# EAGLE board smart-servo-addon-board v97 (EAGLE 9.7.0)
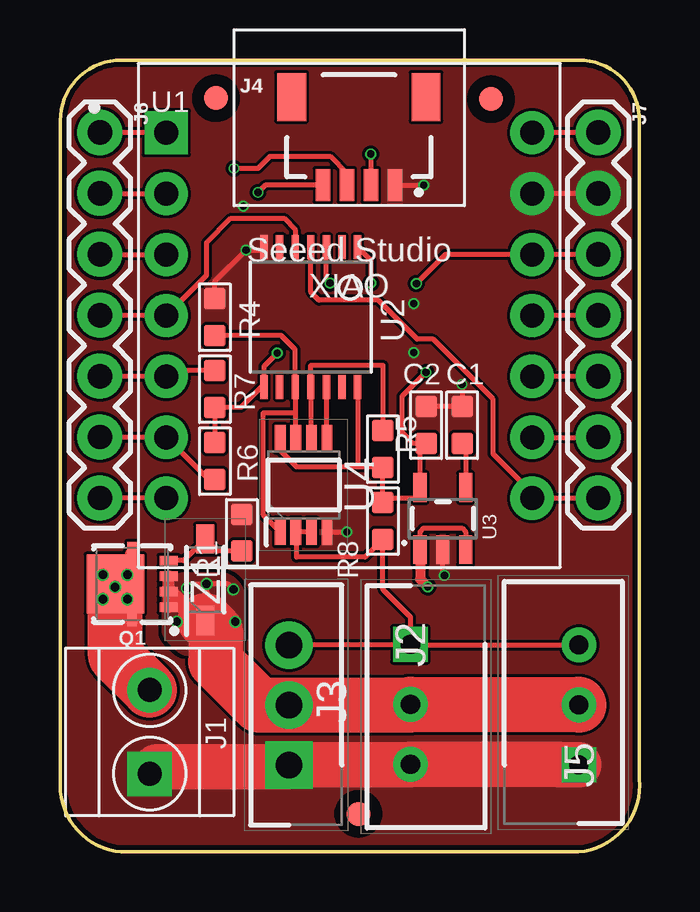
[diagram p0: board, top side]
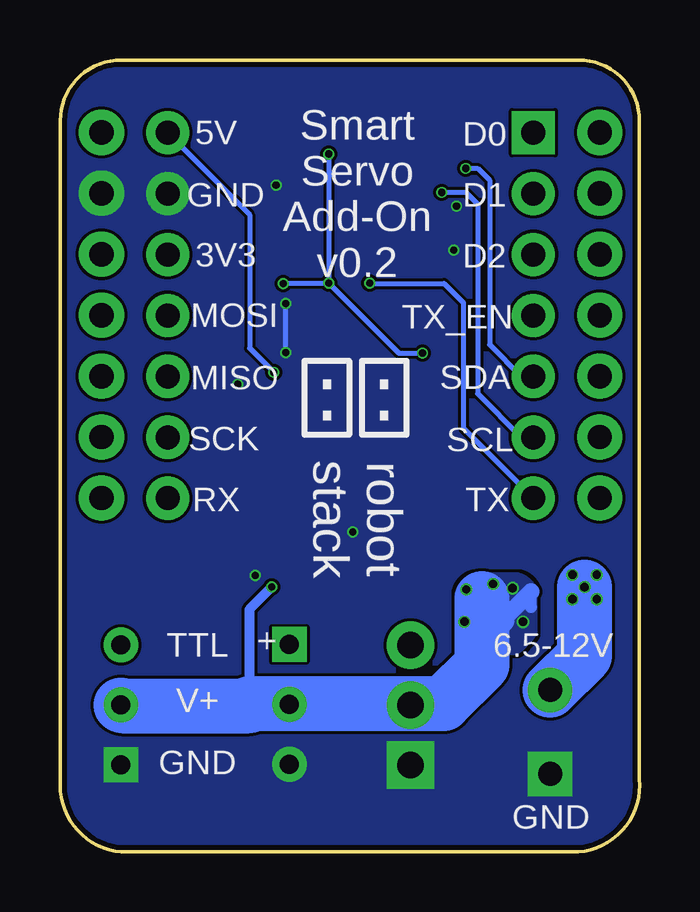
[diagram p1: board, bottom side, seen from below]

Size 24.15 x 33.02 mm. Coordinates in mm from the lower left corner, seen from the top.
Outline: 2.55,33.02 arc90 0.01,30.48 0.01,3.05 arc90 2.55,0 21.6,0 arc90 24.14,3.05 24.14,30.48 arc90 21.6,33.02 2.55,33.02
Copper layers (1*16): Top 0.035mm / dielectric 1.6mm / Bottom 0.035mm
Design rules "jlcpcb-2layers *": minimum track width 5mil, minimum drill 0.3mm, track to track 5mil, track to pad 5mil, pad to pad 5mil, via to via 5mil, smd to smd 5mil, copper to edge 0.2mm, drill to drill 6mil, minimum pad ring 10mil, minimum via ring 3mil, stop-mask expansion 4mil, vias tented up to drill 0mil, thermal gap 0mil

## Footprints (pad centres in the part's own frame; a part is rotated, then mirrored left to right if it is on the bottom)
C0603 = smd 0.889 x 0.889: 1 0,0.762; 2 0,-0.762
FIDUCIAL_1MM = smd 1 x 1: 1 0,0
H2-3.5-7.0X7.0MM = drill 1 pad 1.85 square: 1 -1.75,0 | drill 1 pad 1.85: 2 1.75,0
SHDR3W60P0X250_1X3_990X490X590 = drill 0.8 pad 1.2 square: 1 0,0 | drill 0.8 pad 1.2: 2 -2.5,0; 3 -5,0
SHDR3W64P0X250_1X3_1000X380X60 = drill 1.1 pad 1.65 square: 1 0,0 | drill 1.1 pad 1.65: 2 2.5,0; 3 5,0
JST04_1MM_RA = smd 0.6 x 1.35: 1 -1.5,0; 2 -0.5,0; 3 0.5,0; 4 1.5,0 | smd 1.2 x 2: NC1 2.8,-3.675; NC2 -2.8,-3.675
1X07 = drill 1.016 pad 1.88: 1 0,0; 2 2.54,0; 3 5.08,0; 4 7.62,0; 5 10.16,0; 6 12.7,0; 7 15.24,0
8-POWERVDFN-3X3 = smd 0.4 x 0.75: 1 -0.975,-1.525; 2 -0.325,-1.525; 3 0.325,-1.525; 4 0.975,-1.525 | smd 2.45 x 2.4: 5@1 0,0.7 | smd 0.53 x 0.4: 5@2 -1.49,0; 5@3 1.49,0
R0603 = smd 0.889 x 0.889: 1 0,0.762; 2 0,-0.762
XIAO-GENERIC-THRUHOLE-MODULE14P-2.54-21X17.8MM = drill 1 pad 1.7 square: 1 -7.62,7.62 | drill 1 pad 1.7: 2 -7.62,5.08; 3 -7.62,2.54; 4 -7.62,0; 5 -7.62,-2.54; 6 -7.62,-5.08; 7 -7.62,-7.62; 8 7.62,-7.62; 9 7.62,-5.08; 10 7.62,-2.54; 11 7.62,0; 12 7.62,2.54; 13 7.62,5.08; 14 7.62,7.62
TSSOP14 = smd 0.305 x 0.991: 1 -1.95,-2.918; 2 -1.3,-2.918; 3 -0.65,-2.918; 4 0,-2.918; 5 0.65,-2.918; 6 1.3,-2.918; 7 1.95,-2.918; 8 1.95,2.918; 9 1.3,2.918; 10 0.65,2.918; 11 0,2.918; 12 -0.65,2.918; 13 -1.3,2.918; 14 -1.95,2.918
SOT23-5 = smd 0.55 x 1.2: 1 -0.95,-1.3; 2 0,-1.3; 3 0.95,-1.3; 4 0.95,1.3; 5 -0.95,1.3
SOP65P400X130-8N = smd 1.1 x 0.45: 1 -1.95,0.975; 2 -1.95,0.325; 3 -1.95,-0.325; 4 -1.95,-0.975; 5 1.95,-0.975; 6 1.95,-0.325; 7 1.95,0.325; 8 1.95,0.975
SOD3716X145N = smd 1.2 x 0.75: 1 -1.7,0; 2 1.7,0

## Placement (x,y rotation side)
C1  10nf  [C0603]  16.75,17.8 0 top
C2  1uf  [C0603]  15.25,17.8 0 top
FD4  FIDUCIAL""  [FIDUCIAL_1MM]  6.5,31.43 0 top
FD5  FIDUCIAL""  [FIDUCIAL_1MM]  12.43,1.59 0 top
FD6  FIDUCIAL""  [FIDUCIAL_1MM]  17.96,31.39 0 top
J1  GREEN-2P-3.5  [H2-3.5-7.0X7.0MM]  3.73,5 90 top
J2  22-03-5035  [SHDR3W60P0X250_1X3_990X490X590]  14.6,8.66 90 top
J3  B3B-EH-A  [SHDR3W64P0X250_1X3_1000X380X60]  9.55,3.63 90 top
J4  QWIIC_RA  [JST04_1MM_RA]  12.45,27.8 180 top
J5  22-03-5035  [SHDR3W60P0X250_1X3_990X490X590]  21.62,3.63 270 top
J6  RS1-07-G  [1X07]  1.66,30 270 top
J7  RS1-07-G  [1X07]  22.43,30 270 top
Q1  9A/30V/15mΩ  [8-POWERVDFN-3X3]  3,11.18 90 top
R1  10K  [R0603]  7.58,13.31 0 top
R4  10K  [R0603]  6.45,22.3 180 top
R5  10K  [R0603]  13.45,16.8 180 top
R6  2K  [R0603]  6.45,16.3 180 top
R7  2K  [R0603]  6.45,19.3 0 top
R8  10K  [R0603]  13.45,13.8 0 top
U1  XIAO-THRUHOLE  [XIAO-GENERIC-THRUHOLE-MODULE14P-2.54-21X17.8MM]  12.05,22.37 0 top
U2  TXB0104PWR  [TSSOP14]  10.45,22.3 180 top
U3  SPX3819M5_5_0  [SOT23-5]  15.95,13.9 0 top
U4  SN74LVC2G241DCTR  [SOP65P400X130-8N]  10.15,15.3 90 top
Z1  BZT52C15-7-F  [SOD3716X145N]  6.05,11.35 90 top

## Library data of the parts
C1 = OPL_Capacitor; MPN: CC0603KRX7R9BB103
C2 = OPL_Capacitor; MPN: CC0603KRX7R8BB105
FD4-FD6 = Airquality_Sensor; BOM: EXCLUDE
J1 = OPL_Connector
J2 J5 = molex-22-03-5035; DESCRIPTION: Header 2.5mm SPOX,WTB,vert, shrouded, 3w Molex SPOX Series, Series Number 5267, 2.5mm Pitch 3 Way 1 Row Straight PCB Header, Solder Termination, 3A; HEIGHT: 5.9mm; MANUFACTURER_NAME: Molex; MANUFACTURER_PART_NUMBER: 22-03-5035; MOUSER_PART_NUMBER: 538-22-03-5035; MOUSER_PRICE-STOCK: https://www.mouser.co.uk/ProductDetail/Molex/22-03-5035?qs=VKrXD49J9Ep%252Bv2WwbOoiPA%3D%3D
J3 = B3B-EH-A; DESCRIPTION: CONN HEADER VERT 3POS 2.5MM; HEIGHT: 6mm; MANUFACTURER_NAME: JST (JAPAN SOLDERLESS TERMINALS); MANUFACTURER_PART_NUMBER: B3B-EH-A
J4 = SparkFun-Connectors; PROD_ID: CONN-13694
J6 J7 = SparkFun-Connectors
Q1 = SparkFun-DiscreteSemi; PROD_ID: TRANS-14715
R1 R4-R8 = OPL_Resistor; MPN: RC0603FR-0710KL
U1 = Seeed Studio XIAO Series
U2 = adafruit
U3 = SparkFun-IC-Power; PROD_ID: VREG-13321
U4 = SN74LVC2G241DCTR; DESCRIPTION: Dual Buffer/Driver With 3-State Outputs; HEIGHT: 1.3mm; MANUFACTURER_NAME: Texas Instruments; MANUFACTURER_PART_NUMBER: SN74LVC2G241DCTR; MOUSER_PART_NUMBER: 595-SN74LVC2G241DCTR; MOUSER_PRICE-STOCK: https://www.mouser.co.uk/ProductDetail/Texas-Instruments/SN74LVC2G241DCTR?qs=FetendrIl6uh8lISnOsUbw%3D%3D
Z1 = BZT52C15-7-F; ARROW_PART_NUMBER: BZT52C15-7-F; ARROW_PRICE-STOCK: https://www.arrow.com/en/products/bzt52c15-7-f/diodes-incorporated?region=europe; DESCRIPTION: Zener Diodes 500mW 15V Zener AEC-Q101 Qualified; HEIGHT: 1.45mm; MANUFACTURER_NAME: Diodes Incorporated; MANUFACTURER_PART_NUMBER: BZT52C15-7-F; MOUSER_PART_NUMBER: 621-BZT52C15-F; MOUSER_PRICE-STOCK: https://www.mouser.co.uk/ProductDetail/Diodes-Incorporated/BZT52C15-7-F?qs=Zq5ylnUbLm6eEGp7%2FW8GPQ%3D%3D

## Nets
3.3V: J4.2 J7.3 R6.2 R7.2 U1.12 U2.1 U2.8
5V: C2.2 J7.1 R5.1 R8.1 U1.14 U2.14 U3.5 U4.8
12V: J1.2 Q1.5@1 Q1.5@2 Q1.5@3
D0: J6.1 U1.1
D1: J6.2 U1.2
D2: J6.3 U1.3
D8: J7.6 U1.9
D9: J7.5 U1.10
D10: J7.4 U1.11
GND: C1.1 C2.1 J1.1 J2.3 J3.1 J4.1 J5.1 J7.2 R1.1 R4.2 U1.13 U2.7 U3.2 U4.4
N$1: U2.13
N$2: C1.2 U3.4
N$4: U2.2
N$5: Q1.4 R1.2 Z1.2
RX: J7.7 U1.8 U2.4
RX_5V: R5.2 U2.11 U4.6
SCL: J4.4 J6.6 R6.1 U1.6
SDA: J4.3 J6.5 R7.1 U1.5
TTL: J2.1 J3.3 J5.3 R8.2 U4.2 U4.3
TX: J6.7 U1.7 U2.3
TX_5V: U2.12 U4.5
TX_EN: J6.4 U1.4 U2.5
TX_EN_5V: R4.1 U2.10 U4.1 U4.7
VOUT: J2.2 J3.2 J5.2 Q1.1 Q1.2 Q1.3 U3.1 U3.3 Z1.1

## Tracks (layer width: path | path; a pad name or v marks a point on that pad's centre or on a via)
3.3V  (via drill 0.3, 0.3 pad 0.25)
  Top 0.203: v9.05,20.8 8.5,20.25 8.5,19.5 | 8.5,19.5 U2.8 | U2.1 12.95,24.67 v12.95,23.72 | R6.2 R7.2 7.54,18.54 8.5,19.5 | v12.95,29.1 J4.2 | v14.85,23.7 16.06,24.91 U1.12 J7.3
  Bottom 0.203: v12.95,29.1 v12.95,23.72 | v12.95,23.72 10.03,20.8 v9.05,20.8 | v14.85,23.7 12.97,23.7 v12.95,23.72
5V  (via drill 0.3)
  Top 0.203: U2.14 12.4,16.12 12.45,16.07 | 13.42,16.07 R5.1 | 12.45,16.07 9.83,16.07 9.18,16.73 U4.8 | 12.45,16.07 13.42,16.07 | 13.42,16.07 13.42,14.6 R8.1 13.65,14.76 14.86,14.76 15,14.9 U3.5 15,16.79 C2.2 14.71,17.04 14.25,17.5 14.25,19 v15.25,20 | U1.14 J7.1
  Bottom 0.203: U1.14 16.25,26.57 16.25,21 v15.25,20
12V  (via drill 0.35)
  Top 0.203: Q1.5@3 2.81,12.47 v2.81,11.56 2.56,11.56 2.3,11.3 Q1.5@1 | Q1.5@2 3,10.34 v2.81,10.54 v2.3,11.05 Q1.5@1 | Q1.5@1 2.05,10.92 2.05,10.8 v1.79,10.54 | Q1.5@1 1.92,11.18 1.79,11.31 v1.79,11.56
  Top 2.286: J1.2 2.3,8.18 Q1.5@1
  Bottom 2.286: J1.2 2.3,8.18 v2.3,11.05
D0
  Top 0.203: U1.1 1.67,29.99 J6.1
D1
  Top 0.203: U1.2 1.67,27.45 J6.2
D2
  Top 0.203: U1.3 1.67,24.91 J6.3
D8
  Top 0.203: U1.9 J7.6
D9
  Top 0.203: U1.10 J7.5
D10
  Top 0.203: U1.11 J7.4
GND  (via drill 0.3)
  Top 0.203: U2.7 8.5,25.09 v7.75,25.09 6.45,23.79 R4.2 | v11.95,13.34 v11.94,13.35 U4.4 | C2.1 C1.1 v16.75,19.5 | J4.1 v15.15,27.8 | U3.2 15.95,11.6 v16.02,11.54 | U1.13 J7.2
  Top 1.905: J1.1 4.04,3.56 9.47,3.56 J3.1 14.57,3.63 J2.3 20.77,3.66 20.8,3.63 J5.1
  Bottom 0.203: v14.74,20.83 v14.74,22.86
  other vias: 7.63,26.92
  pour Bottom (rank 2): 0.16,0.15 23.99,0.15 23.99,32.87 0.16,32.87
  pour Top (rank 2): 0.09,0.08 24.07,0.08 24.07,32.94 0.09,32.94
N$2
  Top 0.203: U3.4 16.9,16.89 C1.2
N$5
  Top 0.203: R1.2 6.56,12.55 Z1.2 5.15,12.15 Q1.4
RX
  Top 0.203: U2.4 10.45,23.34 10.79,23 13.25,23 14.88,21.38 15.55,21.38 18.05,18.88 18.05,16.59 19.67,14.97 U1.8 J7.7
RX_5V
  Top 0.203: U4.6 10.45,17.27 U2.11 10.45,20.3 13.45,20.3 R5.2
SCL  (via drill 0.3)
  Top 0.203: J4.4 8.55,27.8 v8.25,27.5 | R6.1 6.19,15.54 U1.6 1.67,17.29 J6.6
  Bottom 0.203: U1.6 4.93,17.29 6.75,19.11 6.75,27 7.25,27.5 v8.25,27.5
SDA  (via drill 0.3)
  Top 0.203: v7.25,28.5 8.25,28.5 8.75,29 11.25,29 11.95,28.3 J4.3 | R7.1 4.66,20.06 U1.5 1.67,19.83 J6.5
  Bottom 0.203: U1.5 4.93,19.83 6.25,21.15 6.25,28 6.75,28.5 v7.25,28.5
TTL
  Top 0.203: U4.3 U4.2 9.85,13.32 9.85,12.3 12.71,12.3 R8.2 13.45,10.95 14.6,9.8 J2.1 | J5.3 14.62,8.63 J2.1 | J2.1 14.57,8.63 J3.3
TX  (via drill 0.3)
  Top 0.203: v11.25,23.72 11.1,23.87 U2.3 | U1.7 1.67,14.75 J6.7
  Bottom 0.203: v11.25,23.72 11.23,23.7 8.15,23.7 7.35,22.9 7.35,17.67 U1.7
TX_5V
  Top 0.203: U2.12 11.1,17.27 U4.5
TX_EN
  Top 0.203: U2.5 9.8,25.95 9.33,26.42 7.12,26.42 6.11,25.4 6.11,24.05 U1.4 1.67,22.37 J6.4
TX_EN_5V
  Top 0.203: 9.8,18.3 U2.10 9.8,20.95 9.21,21.54 R4.1 | 9.8,18.3 9.8,17.27 U4.7 | 9.8,18.3 8.45,18.3 8.45,14.07 U4.1
VOUT  (via drill 0.3, 0.35)
  Top 0.203: U3.3 16.9,13.35 16.75,13.5 15.15,13.5 15,13.35 U3.1 | v7.23,10.95 7,11.18 v6.11,11.18 | v6.11,11.18 5.47,11.18 v5.3,11 | v6.11,11.18 6.11,10.85 v4.86,9.6 | v7.3,9.6 6.11,10.79 v6.11,11.18
  Top 0.406: U3.1 15,11.38 v15.33,11.05
  Top 0.508: Q1.3 Q1.2 Q1.1
  Top 0.711: Q1.2 5.73,9.65
  Top 1.016: 5.73,9.65 Z1.1
  Top 2.286: Z1.1 6.49,9.21 6.49,7.93 8.29,6.13 J3.2 14.57,6.13 J2.2 21.6,6.16 J5.2
  Bottom 0.406: v15.33,11.05 16.27,10.11 16.27,6.19 16.27,6.1
  Bottom 0.508: Q1.1 Q1.2
  Bottom 0.711: Q1.2 5.73,9.65
  Bottom 1.016: 5.73,9.65 Z1.1
  Bottom 2.286: J5.2 21.58,6.1 16.27,6.1 | 16.27,6.19 8.18,6.19 6.57,7.8 6.57,10.57
  pour Top (no thermals): 5.55,9.27 6.59,9.27 6.59,10.54 5.32,10.54 5.32,9.52
  pour Bottom: 5.59,9.27 6.59,9.27 6.59,10.54 5.32,10.54 5.32,9.57

## Text on the board
bPlace: D0 | 5V | D1 | Smart / Servo / Add-On / v0.2 | GND | D2 | 3V3 | TX_EN | MOSI | . | . | SDA | MISO | . | . | SCL | SCK | TX | RX | robot / stack | 6.5-12V | + | TTL | V+ | GND | GND